# EAGLE board mf_tray_mb_v9 (EAGLE 8.0.1), part 1 of 2
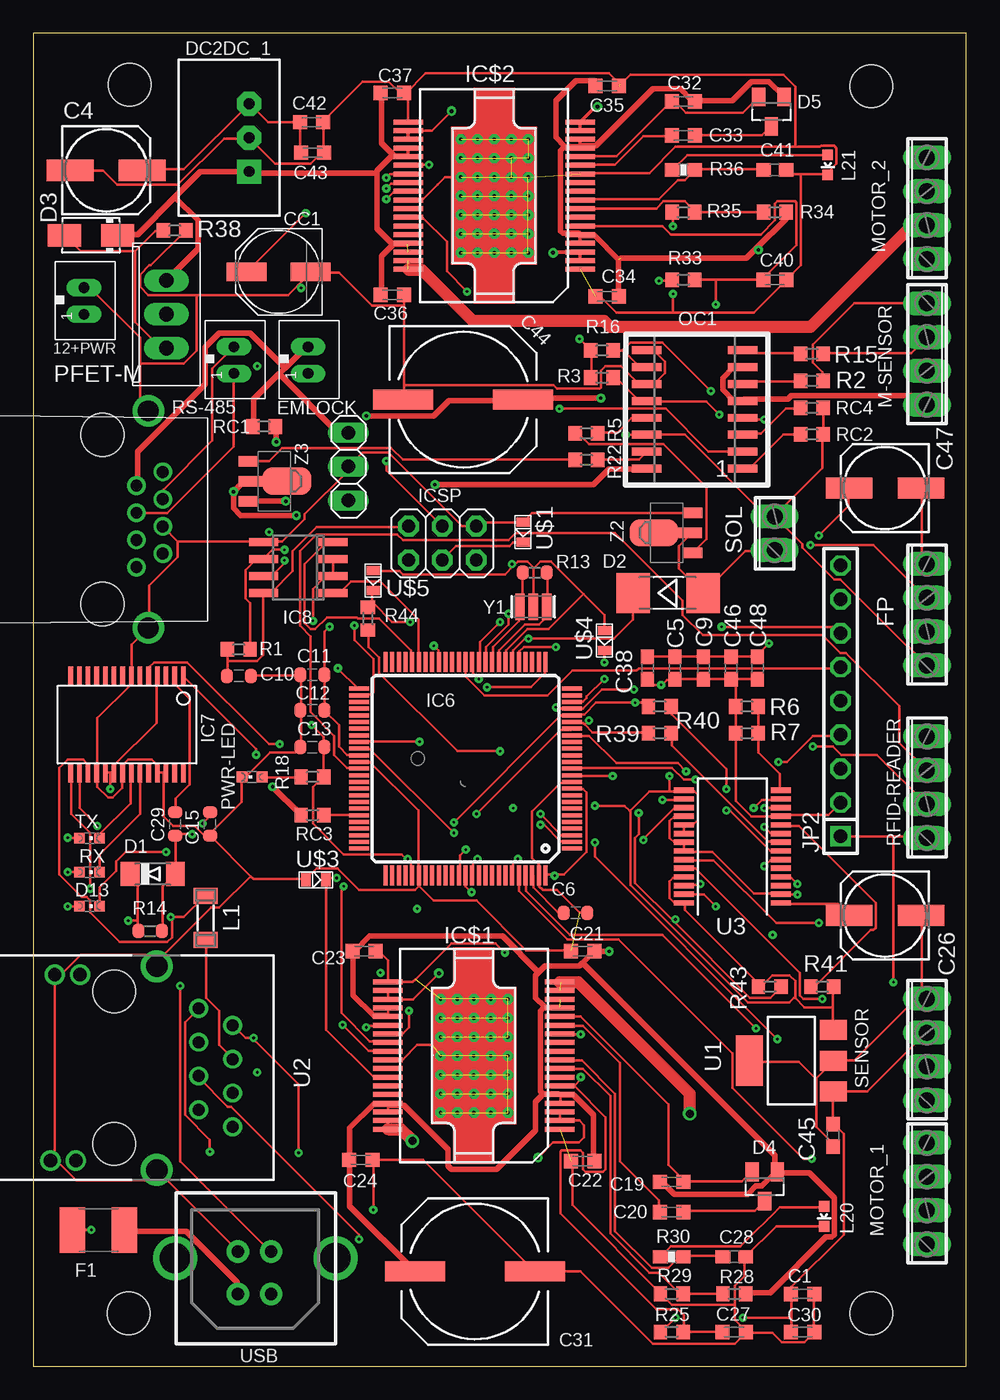
[diagram p0: board, top side]
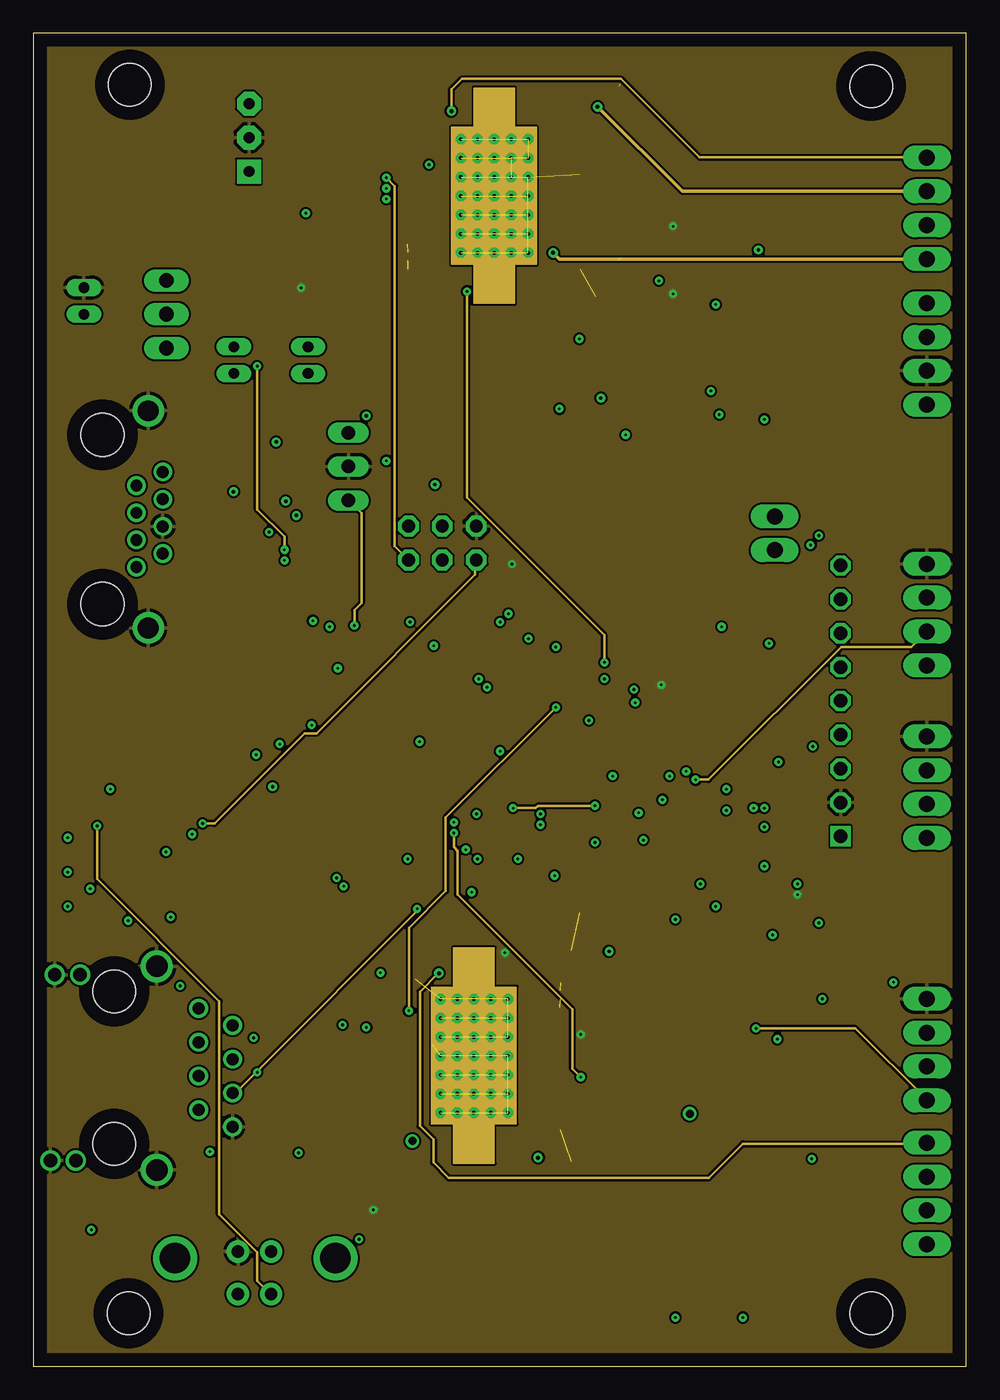
[diagram p1: board, inner layer Route2]
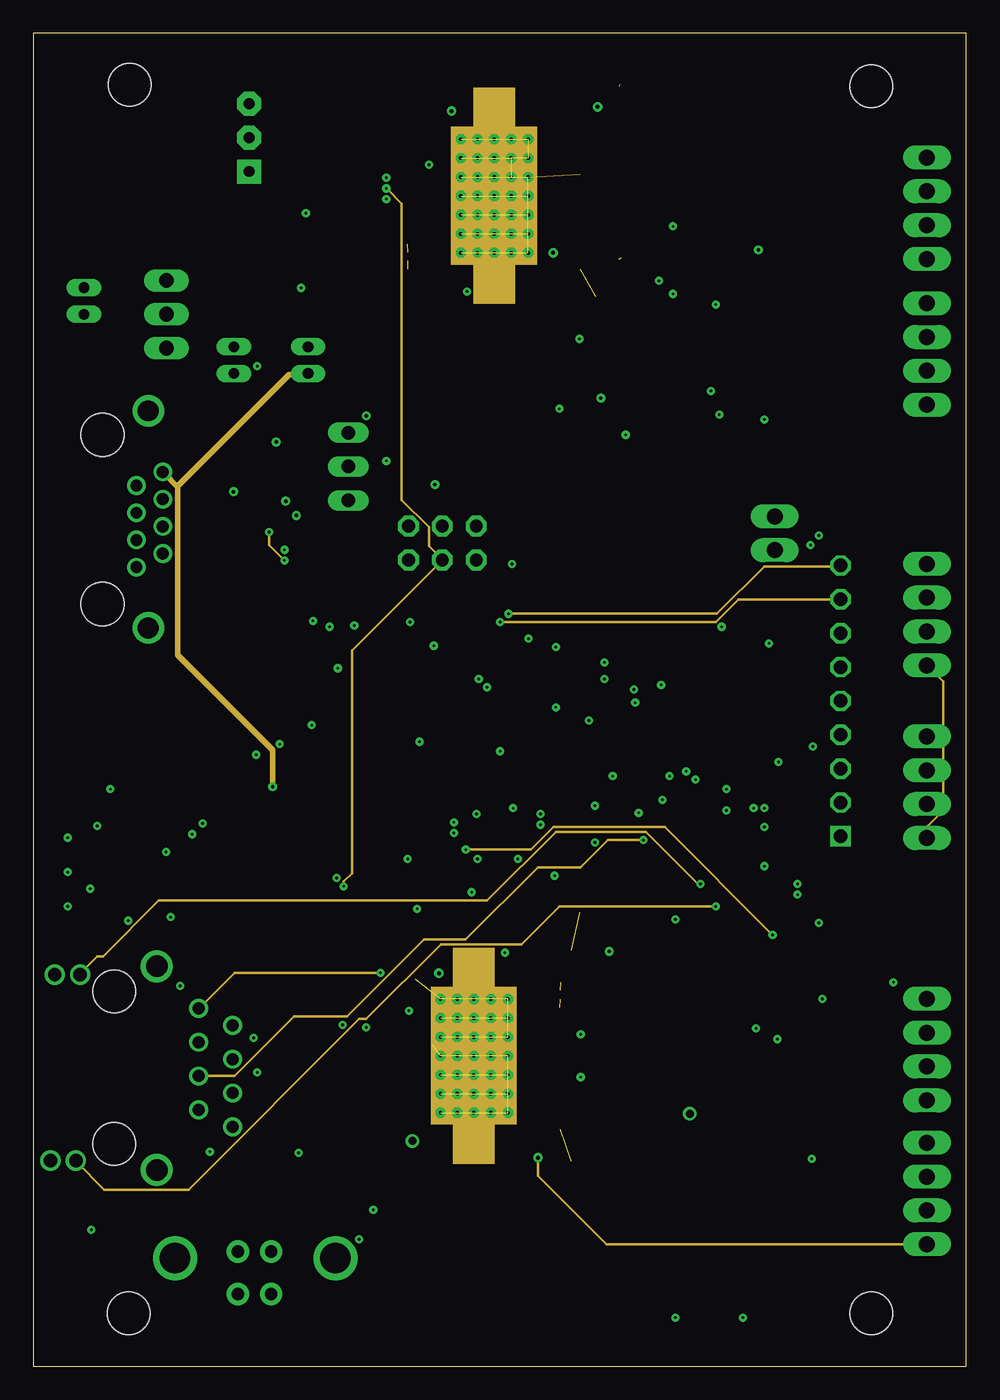
[diagram p2: board, inner layer Route15]
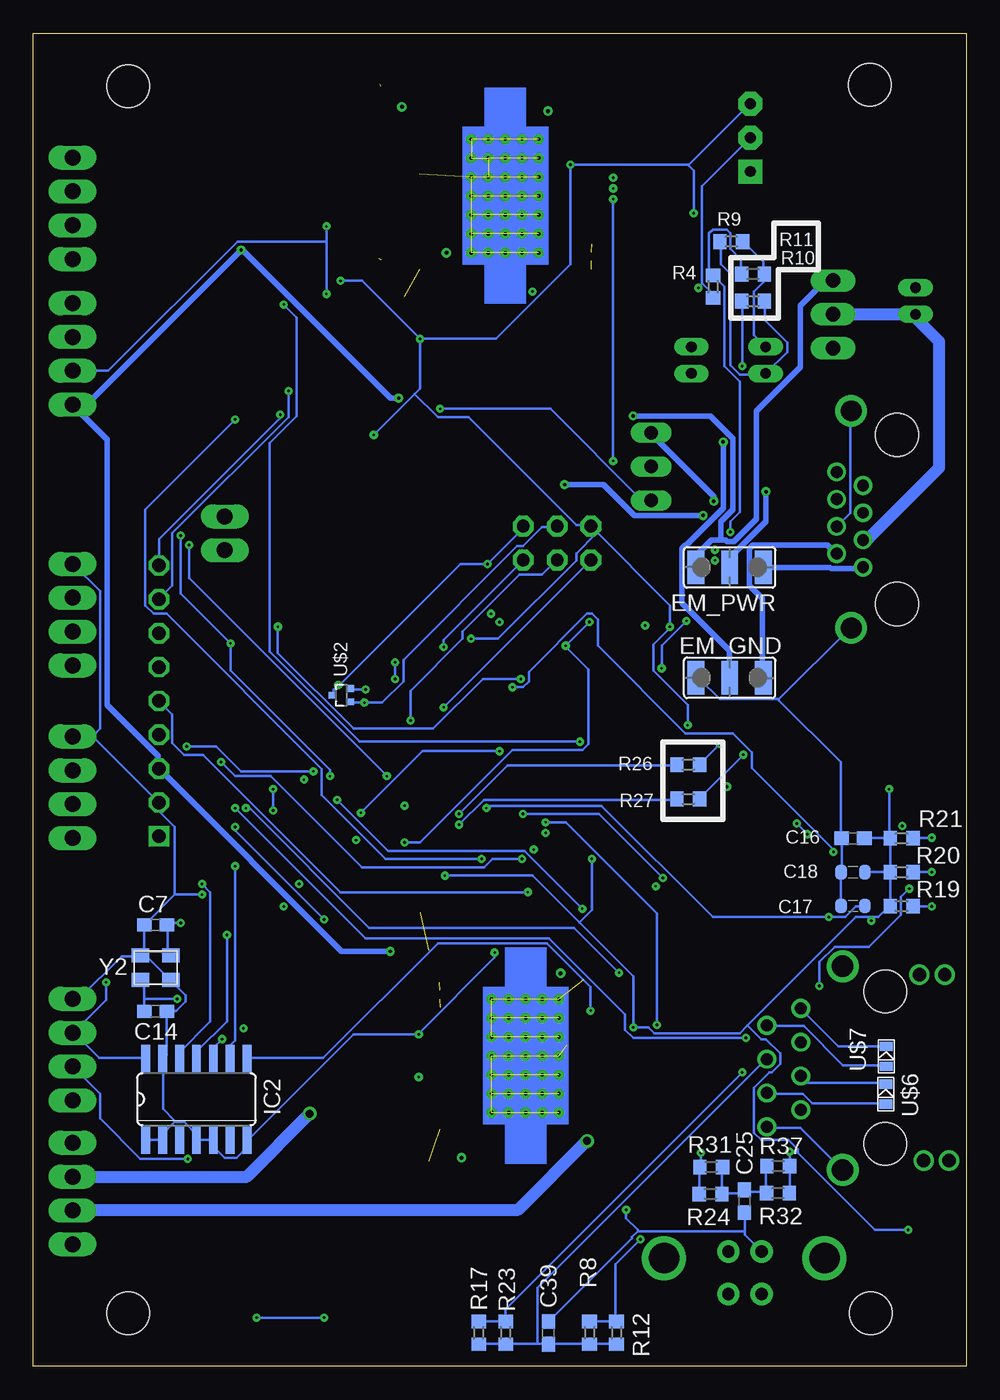
[diagram p3: board, bottom side, seen from below]

Size 70 x 100 mm. Coordinates in mm from the lower left corner, seen from the top.
Outline: 0,0 70,0 70,100 0,100 0,0
Copper layers (1+2*15+16): Top 0.035mm / dielectric 1.5mm / Route2 0.035mm / dielectric 0.15mm / Route15 0.035mm / dielectric 0.2mm / Bottom 0.035mm
Design rules "default *": minimum track width 8mil, minimum drill 8mil, track to track 6mil, track to pad 6mil, pad to pad 6mil, via to via 6mil, smd to smd 6mil, copper to edge 40mil, drill to drill 8mil, minimum pad ring 10mil, minimum via ring 8mil, stop-mask expansion 4mil, vias tented up to drill 0mil, thermal gap 10mil
Net classes: 1 power: width 0.406 mm, drill 0.254 mm, clearance 0.152 mm; 2 Massa: width 1.2 mm, drill 0.6 mm, clearance 0.2 mm; 3 Mot: width 1.2 mm, drill 0.8 mm, clearance 0.005 mm; 4 aref: width 0.305 mm, drill 0.61 mm, clearance 0.254 mm; 5 0.6096: width 0.61 mm, drill 0.406 mm, clearance 0.254 mm; 6 0.900: width 0.9 mm, drill 0.6 mm, clearance 0.5 mm
Holes 3.2 mm at 62.87,96.04 7.14,3.97 62.87,3.97 7.24,96.14

## Footprints (pad centres in the part's own frame; a part is rotated, then mirrored left to right if it is on the bottom)
JST_B2B-PH_HEADER = drill 0.8 long: P1 1.075,0.048; P2 -0.925,0.048
C0603K = smd 1.05 x 1.08: 1 -0.875,0; 2 0.875,0
153CLV-0605 = smd 3.5 x 1.6: + 2.7,0; - -2.7,0
C0603 = smd 1.1 x 1: 1 -0.85,0; 2 0.85,0
C0603-ROUND = smd 0.898 x 1.1: 1 -0.889,0; 2 0.889,0
NIC_10X10.5_CAP = smd 4.5 x 1.5: + 4.5,0; - -4.5,0
PANASONIC_D = smd 3 x 1.4: + 2.4,0; - -2.4,0
MINIMELF = smd 1.4 x 1.8: A 1.7,0; C -1.7,0
MELF-MLL41 = smd 2.5 x 3: A 2.625,0; C -2.625,0
DO214AC = smd 2.5 x 1.7: A 2,0; C -2,0
SOT23 = smd 1 x 1.4: 1 -0.95,-1.1; 2 0.95,-1.1; 3 0,1.1
CHIPLED_0603 = smd 0.8 x 0.8: A 0,-0.75; C 0,0.75
TSR-1 = drill 0.8 pad 1.8 square: 1 -2.54,-1.5 | drill 0.8 pad 1.8 octagon: 2 0,-1.5; 3 2.54,-1.5
SJ_2W = smd 1.27 x 2.54: 1 -2.54,0; 2 0,0; 3 2.54,0
L1812 = smd 1.9 x 3.4: 1 -1.95,0; 2 1.95,0
4POL254 = drill 1.2 long: 1 -3.81,0; 2 -1.27,0; 3 1.27,0; 4 3.81,0
SO14 = smd 0.66 x 2.032: 1 -3.81,-3.073; 2 -2.54,-3.073; 3 -1.27,-3.073; 4 0,-3.073; 5 1.27,-3.073; 6 2.54,-3.073; 7 3.81,-3.073; 8 3.81,3.073; 9 2.54,3.073; 10 1.27,3.073; 11 0,3.073; 12 -1.27,3.073; 13 -2.54,3.073; 14 -3.81,3.073
TQFP100 = smd 1.5 x 0.3: 1 -8,6; 2 -8,5.5; 3 -8,5; 4 -8,4.5; 5 -8,4; 6 -8,3.5; 7 -8,3; 8 -8,2.5; 9 -8,2; 10 -8,1.5; 11 -8,1; 12 -8,0.5; 13 -8,0; 14 -8,-0.5; 15 -8,-1; 16 -8,-1.5; 17 -8,-2; 18 -8,-2.5; 19 -8,-3; 20 -8,-3.5; 21 -8,-4; 22 -8,-4.5; 23 -8,-5; 24 -8,-5.5; 25 -8,-6; 51 8,-6; 52 8,-5.5; 53 8,-5; 54 8,-4.5; 55 8,-4; 56 8,-3.5; 57 8,-3; 58 8,-2.5; 59 8,-2; 60 8,-1.5; 61 8,-1; 62 8,-0.5; 63 8,0; 64 8,0.5; 65 8,1; 66 8,1.5; 67 8,2; 68 8,2.5; 69 8,3; 70 8,3.5; 71 8,4; 72 8,4.5; 73 8,5; 74 8,5.5; 75 8,6 | smd 0.3 x 1.5: 26 -6,-8; 27 -5.5,-8; 28 -5,-8; 29 -4.5,-8; 30 -4,-8; 31 -3.5,-8; 32 -3,-8; 33 -2.5,-8; 34 -2,-8; 35 -1.5,-8; 36 -1,-8; 37 -0.5,-8; 38 0,-8; 39 0.5,-8; 40 1,-8; 41 1.5,-8; 42 2,-8; 43 2.5,-8; 44 3,-8; 45 3.5,-8; 46 4,-8; 47 4.5,-8; 48 5,-8; 49 5.5,-8; 50 6,-8; 76 6,8; 77 5.5,8; 78 5,8; 79 4.5,8; 80 4,8; 81 3.5,8; 82 3,8; 83 2.5,8; 84 2,8; 85 1.5,8; 86 1,8; 87 0.5,8; 88 0,8; 89 -0.5,8; 90 -1,8; 91 -1.5,8; 92 -2,8; 93 -2.5,8; 94 -3,8; 95 -3.5,8; 96 -4,8; 97 -4.5,8; 98 -5,8; 99 -5.5,8; 100 -6,8
SSOP28DB = smd 0.348 x 1.397: 1 -4.225,-3.656; 2 -3.575,-3.656; 3 -2.925,-3.656; 4 -2.275,-3.656; 5 -1.625,-3.656; 6 -0.975,-3.656; 7 -0.325,-3.656; 8 0.325,-3.656; 9 0.975,-3.656; 10 1.625,-3.656; 11 2.275,-3.656; 12 2.925,-3.656; 13 3.575,-3.656; 14 4.225,-3.656; 15 4.225,3.656; 16 3.575,3.656; 17 2.925,3.656; 18 2.275,3.656; 19 1.625,3.656; 20 0.975,3.656; 21 0.325,3.656; 22 -0.325,3.656; 23 -0.975,3.656; 24 -1.625,3.656; 25 -2.275,3.656; 26 -2.925,3.656; 27 -3.575,3.656; 28 -4.225,3.656
SO-08 = smd 0.6 x 2.2: 1 -1.905,-2.6; 2 -0.635,-2.6; 3 0.635,-2.6; 4 1.905,-2.6; 5 1.905,2.6; 6 0.635,2.6; 7 -0.635,2.6; 8 -1.905,2.6
L6470_4L_2_15-POWERSO36 = smd 0.38 x 2.2: ADCIN 7.09,0.37; AGND 9.69,0.37; BUSY\SYNC 7.09,13.27; CK 9.04,13.27; CP 10.34,0.37; CS 6.44,13.27; DGND 7.74,13.27; FLAG 5.79,13.27; OSCIN 8.39,0.37; OSCOUT 9.04,0.37; OUT1A_1 3.19,0.37; OUT1A_2 3.84,0.37; OUT1B_1 12.94,0.37; OUT1B_2 13.59,0.37; OUT2A_1 3.19,13.27; OUT2A_2 2.54,13.27; OUT2B_1 12.94,13.27; OUT2B_2 12.29,13.27; PGND_1 2.54,0.37; PGND_2 13.59,13.27; SDI 8.39,13.27; SDO 9.69,13.27; STBY/RST 5.79,0.37; STCK 5.14,13.27; SW 6.44,0.37; VBOOT 10.99,0.37; VDD 10.34,13.27; VREG 7.74,0.37; VSA_1 4.49,0.37; VSA_2 5.14,0.37; VSA_3 4.49,13.27; VSA_4 3.84,13.27; VSB_1 11.64,0.37; VSB_2 12.29,0.37; VSB_3 11.64,13.27; VSB_4 10.99,13.27 | drill 0.254 octagon: GND_1 3.78,4.27; GND_2 5.2,4.27; GND_3 6.62,4.27; GND_4 8.04,4.27; GND_5 9.46,4.27; GND_6 10.88,4.27; GND_7 12.3,4.27; GND_8 12.3,5.545; GND_9 10.88,5.545; GND_10 9.46,5.545; GND_11 8.04,5.545; GND_12 6.62,5.545; GND_13 5.2,5.545; GND_14 3.78,5.545; GND_15 12.3,6.82; GND_16 10.88,6.82; GND_17 9.46,6.82; GND_18 8.04,6.82; GND_19 6.62,6.82; GND_20 5.2,6.82; GND_21 3.78,6.82; GND_22 3.78,8.07; GND_23 5.2,8.07; GND_24 6.62,8.07; GND_25 8.04,8.07; GND_26 9.46,8.07; GND_27 10.88,8.07; GND_28 12.3,8.07; GND_29 12.3,9.32; GND_30 10.88,9.32; GND_31 9.46,9.32; GND_32 8.04,9.32; GND_33 6.62,9.32; GND_34 5.2,9.32; GND_35 3.78,9.32
2X03 = drill 0.95 pad 1.55 octagon: 1 -2.54,-1.27; 2 -2.54,1.27; 3 0,-1.27; 4 0,1.27; 5 2.54,-1.27; 6 2.54,1.27
1X09 = drill 1.016 square: 1 -10.16,0 | drill 1.016 octagon: 2 -7.62,0; 3 -5.08,0; 4 -2.54,0; 5 0,0; 6 2.54,0; 7 5.08,0; 8 7.62,0; 9 10.16,0
SM-1206 = smd 1.2 x 1.8: 1 -1.65,0; 2 1.65,0
LED-0603 = smd 0.8 x 0.8: A 0,-0.75; C 0,0.75
SOP16 = smd 0.6 x 2.2: 1 -4.455,-3.6; 2 -3.185,-3.6; 3 -1.915,-3.6; 4 -0.645,-3.6; 5 0.625,-3.6; 6 1.895,-3.6; 7 3.165,-3.6; 8 4.435,-3.6; 9 4.435,3.6; 10 3.165,3.6; 11 1.895,3.6; 12 0.625,3.6; 13 -0.645,3.6; 14 -1.915,3.6; 15 -3.185,3.6; 16 -4.455,3.6
FQP47P06-NORMAL = drill 1.118 long: 1 2.54,-2.54; 2 5.08,-2.54; 3 7.62,-2.54
R0603@1 = smd 1 x 1.1: 1 -0.85,0; 2 0.85,0
R0603 = smd 1 x 1.1: 1 -0.85,0; 2 0.85,0
R0603-ROUND = smd 0.898 x 1.1: 1 -0.889,0; 2 0.889,0
0603-RES = smd 1.1 x 1: 1 -0.85,0; 2 0.85,0
2POL254 = drill 1.2 long: 1 -1.27,0; 2 1.27,0
SOT223 = smd 1.5 x 2: 1 -3.57,-3.15; 2 -1.27,-3.15; 3 1.03,-3.15 | smd 3.8 x 2: 4 -1.27,3.15
5-6605758-1 = drill 0.9 pad 1.3: 1 -4.445,0; 2 -3.175,2.54; 3 -1.905,0; 4 -0.635,2.54; 5 0.635,0; 6 1.905,2.54; 7 3.175,0; 8 4.445,2.54 | drill 1 pad 1.422: D1 -6.973,-8.902; D2 -6.973,-10.807; D3 6.973,-9.219; D4 6.973,-11.124 | drill 1.6 pad 2.184: M1 7.683,-3.141; M2 -7.603,-3.141 | hole 3.2: 5.715,-6.35; -5.715,-6.35
SSOP28 = smd 0.4 x 1.5: 1 -4.225,-3.625; 2 -3.575,-3.625; 3 -2.925,-3.625; 4 -2.275,-3.625; 5 -1.625,-3.625; 6 -0.975,-3.625; 7 -0.325,-3.625; 8 0.325,-3.625; 9 0.975,-3.625; 10 1.625,-3.625; 11 2.275,-3.625; 12 2.925,-3.625; 13 3.575,-3.625; 14 4.225,-3.625; 15 4.225,3.625; 16 3.575,3.625; 17 2.925,3.625; 18 2.275,3.625; 19 1.625,3.625; 20 0.975,3.625; 21 0.325,3.625; 22 -0.325,3.625; 23 -0.975,3.625; 24 -1.625,3.625; 25 -2.275,3.625; 26 -2.925,3.625; 27 -3.575,3.625; 28 -4.225,3.625
1X03 = drill 1.016 long: 1 -2.54,0; 2 0,0; 3 2.54,0
0402 = smd 0.7 x 1: A -0.5,0; C 1,0
SOT416 = smd 0.5 x 0.6: 1 -0.5,-0.65; 2 0.5,-0.65; 3 0,0.65
RJ45-TOP = drill 0.89: 1 3.58,2.54; 2 2.56,4.52; 3 1.54,2.54; 4 0.52,4.52; 5 -0.5,2.54; 6 -1.52,4.52; 7 -2.54,2.54; 8 -3.56,4.52 | drill 1.57: GND1 -8.15,3.43; GND2 8.13,3.43 | hole 3.25: -6.35,0; 6.35,0
USB-B-PTH-VERTICAL = drill 0.914 pad 1.676: D+ 4.826,4.394; D- 4.826,7.595; GND 7.315,4.394; VBUS 7.315,7.595 | drill 2.286: P$1 0,4.902; P$2 12.04,4.902
RESONATOR = smd 0.7 x 2: 1 -1,0; 2 0,0; 3 1,0
CRYSTAL-3.2-2.5 = smd 1.3 x 1.05: 1 -1.15,-0.925; 2 1.15,-0.925; 3 1.15,0.925; 4 -1.15,0.925
SOT89 = smd 0.8 x 1.4: 1 -1.499,-1.981; 3 1.499,-1.981 | smd 0.8 x 1.9: 2 0,-1.727 | smd 2.032 x 3.65: 2@1 0,0.94

## Placement (x,y rotation side)
12+PWR  [JST_B2B-PH_HEADER]  3.75,80 270 top
C1  100n  [C0603K]  57.72,5.43 180 top
C4  10u  [153CLV-0605]  5.47,89.72 0 top
C5  100n  [C0603]  48.14,52.38 270 top
C6  100n  [C0603-ROUND]  40.69,34.01 0 top
C7  22p  [C0603]  60.82,33.11 180 bottom
C9  100n  [C0603]  50.28,52.38 270 top
C10  100n  [C0603-ROUND]  15.42,51.79 0 top
C11  100n  [C0603-ROUND]  20.94,51.87 180 top
C12  100n  [C0603-ROUND]  20.94,49.21 180 top
C13  100n  [C0603-ROUND]  20.94,46.45 180 top
C14  22p  [C0603]  60.82,26.62 0 bottom
C15  22p  [C0603-ROUND]  13.25,40.67 270 top
C16  100n  [C0603]  8.49,39.6 180 bottom
C17  100n  [C0603-ROUND]  8.49,34.52 0 bottom
C18  100n  [C0603-ROUND]  8.49,37.06 180 bottom
C19  220n  [C0603K]  47.9,13.83 180 top
C20  10n  [C0603K]  47.9,11.57 0 top
C21  100n  [C0603K]  41.24,31.13 0 top
C22  100n  [C0603K]  41.24,15.38 0 top
C23  100n  [C0603K]  24.82,31.13 180 top
C24  100n  [C0603K]  24.59,15.48 180 top
C25  10n  [C0603]  16.65,12.38 270 bottom
C26  10u  [153CLV-0605]  63.9,33.82 180 top
C27  1n  [C0603K]  52.59,2.57 180 top
C28  10uF  [C0603]  52.59,8.21 0 top
C29  100n  [C0603-ROUND]  10.63,40.67 270 top
C30  1u  [C0603K]  57.71,2.57 180 top
C31  100uF  [NIC_10X10.5_CAP]  33.14,7.11 180 top
C32  220n  [C0603K]  48.78,94.88 0 top
C33  10n  [C0603K]  48.78,92.34 0 top
C34  100n  [C0603K]  43.07,80.25 0 top
C35  100n  [C0603K]  43.06,96.04 180 top
C36  100n  [C0603K]  26.94,80.38 180 top
C37  100n  [C0603K]  26.94,95.52 180 top
C38  100n  [C0603]  46.08,52.38 270 top
C39  100n  [C0603]  31.34,2.49 90 bottom
C40  1n  [C0603K]  55.64,81.5 180 top
C41  10uF  [C0603]  55.64,89.75 0 top
C42  100n  [C0603K]  20.88,93.33 180 top
C43  1u  [C0603K]  20.95,91.05 180 top
C44  100uF  [NIC_10X10.5_CAP]  32.25,72.52 0 top
C45  100n  [C0603]  60.01,17.32 270 top
C46  100n  [C0603]  52.35,52.38 270 top
C47  10u  [153CLV-0605]  63.9,65.88 180 top
C48  100n  [C0603]  54.33,52.38 270 top
CC1  47u  [PANASONIC_D]  18.42,82.1 180 top
D1  CD1206  [MINIMELF]  8.96,36.93 0 top
D2  SM4007  [MELF-MLL41]  47.63,58.01 0 top
D3  [DO214AC]  4.33,84.84 180 top
D4  BAV99  [SOT23]  54.88,13.48 180 top
D5  BAV99  [SOT23]  55.38,94.12 180 top
D13  [CHIPLED_0603]  4.21,34.52 270 top
DC2DC_1  TSR1-2450  [TSR-1]  14.69,92.17 90 top
EM_GND  [SJ_2W]  17.75,51.65 0 bottom
EM_PWR  [SJ_2W]  17.75,59.94 0 bottom
EMLOCK  [JST_B2B-PH_HEADER]  20.57,75.56 270 top
F1  500mA  [L1812]  4.89,10.22 0 top
FP  2.5mm  [4POL254]  67.06,56.39 90 top
IC2  74ACT125D  [SO14]  57.76,20.03 0 bottom
IC6  [TQFP100]  32.43,44.83 180 top
IC7  FT232RL  [SSOP28DB]  7.04,48.14 180 top
IC8  MAX485  [SO-08]  19.89,59.92 90 top
IC$1  L6470L6470_4L_2_15  [L6470_4L_2_15-POWERSO36]  39.88,15.24 90 top
IC$2  L6470L6470_4L_2_15  [L6470_4L_2_15-POWERSO36]  41.4,79.76 90 top
ICSP  [2X03]  30.7,61.76 0 top
JP2  [1X09]  60.58,49.91 90 top
L1  Ferrit Bead  [SM-1206]  12.93,33.65 90 top
L20  Amber  [LED-0603]  59.34,11.25 180 top
L21  Amber  [LED-0603]  59.61,90.11 180 top
M-SENSOR  [4POL254]  67.06,75.95 270 top
MOTOR_1  M1  [4POL254]  67.06,12.95 90 top
MOTOR_2  M2  [4POL254]  67.06,86.87 90 top
OC1  ACPL-247  [SOP16]  49.62,71.8 90 top
PFET-M  [FQP47P06-NORMAL]  7.45,73.84 90 top
PWR-LED  [CHIPLED_0603]  16.42,44.21 90 top
R1  4.7k  [R0603@1]  15.42,53.79 180 top
R2  2.2k  [R0603@1]  58.42,73.91 0 top
R3  1k  [R0603@1]  42.67,74.17 0 top
R4  4.7k  [R0603@1]  19,81 90 bottom
R5  330  [R0603@1]  41.5,70 0 top
R6  2k7  [R0603]  53.54,47.5 180 top
R7  15k  [R0603]  53.54,49.5 180 top
R8  100R  [R0603]  28.27,2.49 270 bottom
R9  120  [R0603@1]  17.64,84.37 180 bottom
R10  10  [R0603@1]  16,79.9 180 bottom
R11  10  [R0603@1]  16,81.93 180 bottom
R12  100R  [R0603]  26.24,2.49 270 bottom
R13  1M  [R0603-ROUND]  37.62,59.54 0 top
R14  10K  [R0603-ROUND]  8.77,32.66 180 top
R15  2.2k  [R0603@1]  58.42,75.95 0 top
R16  1k  [R0603@1]  42.67,76.2 0 top
R17  100R  [R0603]  36.59,2.49 270 bottom
R18  1k  [R0603@1]  20.94,44.21 0 top
R19  1k  [R0603@1]  4.85,34.52 180 bottom
R20  1k  [R0603@1]  4.85,37.06 0 bottom
R21  1k  [R0603@1]  4.85,39.6 0 bottom
R22  330  [R0603@1]  41.5,68 0 top
R23  100R  [R0603]  34.55,2.49 270 bottom
R24  100R  [R0603]  19.18,12.92 180 bottom
R25  10k  [R0603]  47.9,2.57 180 top
R26  1k  [R0603@1]  20.86,45.12 180 bottom
R27  1k  [R0603@1]  20.86,42.55 180 bottom
R28  2.7k  [R0603]  52.59,5.43 0 top
R29  51k  [R0603]  47.9,5.43 0 top
R30  1K  [0603-RES]  47.9,8.21 0 top
R31  100R  [R0603]  19.13,14.95 180 bottom
R32  100R  [R0603]  14.11,12.98 0 bottom
R33  10k  [R0603]  48.78,81.5 180 top
R34  2.7k  [R0603]  55.64,86.58 0 top
R35  51k  [R0603]  48.78,86.58 0 top
R36  1K  [0603-RES]  48.78,89.75 0 top
R37  100R  [R0603]  14.11,15.02 0 bottom
R38  1k  [R0603]  10.61,85.21 0 top
R39  100R  [R0603]  47,47.5 180 top
R40  100R  [R0603]  47,49.5 180 top
R41  10k  [R0603]  59.19,28.47 0 top
R43  10k  [R0603]  55.26,28.48 180 top
R44  100R  [R0603]  25.11,56.08 90 top
RC1  1k  [R0603@1]  17.32,70.5 180 top
RC2  470  [R0603@1]  58.42,69.9 0 top
RC3  1k  [R0603@1]  20.94,41.34 0 top
RC4  470  [R0603@1]  58.42,71.89 0 top
RFID-READER  ID-12LA  [4POL254]  67.06,43.43 90 top
RS-485  [JST_B2B-PH_HEADER]  15,75.56 270 top
RX  GREEN  [CHIPLED_0603]  4.21,37.06 270 top
SENSOR  SENSOR  [4POL254]  67.06,23.75 90 top
SOL  [2POL254]  55.63,62.48 90 top
TX  YELLOW  [CHIPLED_0603]  4.21,39.6 270 top
U1  TC1262-33VDB  [SOT223]  56.88,24.19 90 top
U2  Tyco 5-6605758-1  [5-6605758-1]  12.41,22.4 270 top
U3  ENC28J60-SSOP  [SSOP28]  52.45,38.98 90 top
U3V12F12  EM_CTRL  [1X03]  23.65,67.5 90 top
U$1  GG0402050R3C2P  [0402]  36.76,62.83 270 top
U$2  RCLAMP0582BQ  [SOT416]  46.88,50.34 90 bottom
U$3  GG0402050R3C2P  [0402]  20.94,36.5 0 top
U$4  GG0402050R3C2P  [0402]  42.87,54.69 270 top
U$5  GG0402050R3C2P  [0402]  25.5,59.19 270 top
U$6  GG0402050R3C2P  [0402]  6.03,20.16 90 bottom
U$7  GG0402050R3C2P  [0402]  6,23 90 bottom
U$10  RJ45-TOP-1-406541-1-CAN-MB  [RJ45-TOP]  5.2,63.53 270 top
USB  USB  [USB-B-PTH-VERTICAL]  22.67,13 180 top
Y1  [RESONATOR]  37.52,56.97 180 top
Y2  25MHz  [CRYSTAL-3.2-2.5]  60.82,29.9 0 bottom
Z2  ZXTN2010Z  [SOT89]  47.51,62.53 90 top
Z3  ZXTN2010Z  [SOT89]  18.1,66.4 270 top

## Library data of the parts
12+PWR EMLOCK RS-485 = SRG
C1 C42 = rcl; MANUFACTURER: Kemet; PARTNR: C0603C104K3RACTU; TYPE: X7R; VOLTAGE: 25V
C4 C26 C47 R1-R5 R9-R11 R15 R16 R18-R22 R26 R27 R38 RC1-RC4 = resistor
C5 C7 C9 C14 C16 C25 C38 C39 C45 C46 C48 CC1 F1 R6-R8 R12 R17 R23 R24 R31 R32 R37 R39-R41 R43 R44 = rcl
C6 C10-C13 C15 C17 C18 C29 IC6 ICSP R13 R14 Y1 Y2 = SmartPrj
C19 C32 = rcl; MANUFACTURER: AVX; PARTNR: 0603YC224MAT2A; TYPE: X7R; VOLTAGE: 16V
C20 C33 = rcl; MANUFACTURER: Vishay; PARTNR: VJ0603Y103KXAAC; TYPE: X7R; VOLTAGE: 50V
C21-C24 C34-C37 = rcl; MANUFACTURER: Kemet; PARTNR: C0603C104K5RACTU; TYPE: X7R; VOLTAGE: 50V
C27 C40 = rcl; MANUFACTURER: Vishay; PARTNR: VJ0603Y102MXQCW1BC; TYPE: X7R; VOLTAGE: 10V
C28 C41 = rcl; MANUFACTURER: Taiyo Yuden; PARTNR: JMK316B7226ML-T; TYPE: X7R; VOLTAGE: 6.3V
C30 C43 = rcl; MANUFACTURER: Kemet; PARTNR: C0603C105K4RACTU; TYPE: X7R; VOLTAGE: 16V
C31 C44 = SparkFun-Capacitors; MOUSER: 647-UUX1J101MNL1GS; PROD_ID: CAP-08362
D1 = diode
D2 = _mod_diode
D3 = 1sma59xx_10; MF: ON Semiconductor; MPN: 1SMA5925BT3G; OC_FARNELL: 1431147; OC_NEWARK: 71J9198
D4 D5 = diode; MANUFACTURER: NXP; PARTNR: BAV99,215
D13 PWR-LED RX TX = led
DC2DC_1 = SteelCaveRobotics-Power
EM_GND EM_PWR = jumper
FP M-SENSOR MOTOR_1 MOTOR_2 RFID-READER SENSOR SOL = con-phoenix-254; OC_FARNELL: unknown; OC_NEWARK: unknown
IC2 = 74xx-eu
IC7 L20 L21 R30 R36 = SparkFun
IC8 = texas; MF: TEXAS INSTRUMENTS; MPN: SN75ALS176AD; OC_FARNELL: 1410742; OC_NEWARK: 76C5099
IC$1 IC$2 = L6470PD
JP2 U3V12F12 = pinhead
L1 = inductor-neosid
OC1 = avago
PFET-M = FQP47P06
R25 R33 = rcl; MANUFACTURER: Vishay; PARTNR: CRCW060339K0FKEA
R28 R29 R34 R35 = rcl; MANUFACTURER: -; PARTNR: -; PLACED: NO
U1 = v-reg-misc
U2 = con-tycoelectronics-1
U3 = microchip-enc28j60
U$1 U$3-U$7 = GG0402050R3C2P
U$2 = SOT
U$10 = con-amphenol-rj45-ld
USB = SparkFun-Connectors
Z2 Z3 = semicon-smd-ipc

## Nets
12PWR+ [power]: C19.2 C21.2 C22.2 C23.2 C24.2 C31.+ C32.2 C34.2 C35.2 C36.2 C37.2 C44.+ D3.C D4.1 D5.1 DC2DC_1.1 EM_PWR.1 IC$1.VSA_1 IC$1.VSA_2 IC$1.VSA_3 IC$1.VSA_4 IC$1.VSB_1 IC$1.VSB_2 IC$1.VSB_3 IC$1.VSB_4 IC$2.VSA_1 IC$2.VSA_2 IC$2.VSA_3 IC$2.VSA_4 IC$2.VSB_1 IC$2.VSB_2 IC$2.VSB_3 IC$2.VSB_4 JP2.3 M-SENSOR.4 OC1.5 OC1.7 PFET-M.3 R28.2 R34.2
12PWR+DIODE [0.900]: 12+PWR.P1 PFET-M.2 U$10.3
+3V3: C5.1 C9.1 C17.2 C38.1 C46.1 C47.+ C48.1 IC7.17 L1.2 R41.2 R43.2 U1.3 U3.15 U3.19 U3.20 U3.25 U3.28
+5V: C1.2 C4.+ C10.1 C11.1 C12.1 C13.1 C16.1 C18.1 C30.2 C42.2 C43.2 C45.1 CC1.+ D1.C D2.C DC2DC_1.3 F1.1 FP.1 IC2.14 IC6.10 IC6.31 IC6.61 IC6.80 IC6.100 IC7.4 IC7.19 IC7.20 IC8.8 IC$1.VDD IC$2.VDD ICSP.2 JP2.1 OC1.14 R1.2 R3.1 R14.2 R16.1 R18.2 R19.2 R20.1 R21.1 R25.2 R33.2 RC2.2 RC4.2 RFID-READER.1 SENSOR.3 SOL.2 U1.1
A8: IC6.89 JP2.4
A9: IC6.88 JP2.5
ADCIN_1: IC$1.ADCIN R28.1 R29.2
ADCIN_2: IC$2.ADCIN R34.1 R35.2
AREF: C6.1 IC6.98
CCW-0_NC: IC$1.SW
CCW-1_NC: IC$2.SW
CS: IC2.10 IC6.42 R44.2 U$5.C
CS_1: IC6.19 IC$1.CS U$3.C
CS_2: IC6.23 IC$2.CS U$4.C
CW-0_NC: IC6.78
CW-1_NC: IC6.77
D11_NC: IC6.24
D37_NC: IC6.53
D46: IC6.38 JP2.6
D47: IC6.37 JP2.7
D48: IC6.36 JP2.8 OC1.10 R16.2
D49: IC6.35 JP2.9 OC1.12 R3.2
D+: IC7.15 USB.D+
D-: IC7.16 USB.D-
DTR: C29.1 IC7.2
ERR_NC: IC6.6
GND: 12+PWR.P2 C1.1 C4.- C5.2 C6.2 C7.2 C9.2 C10.2 C11.2 C12.2 C13.2 C14.2 C15.2 C16.2 C17.1 C18.2 C21.1 C22.1 C23.1 C24.1 C25.2 C26.- C27.1 C28.2 C30.1 C31.- C34.1 C35.1 C36.1 C37.1 C38.2 C39.2 C40.1 C41.2 C42.1 C43.1 C44.- C45.2 C46.2 C47.- C48.2 CC1.- DC2DC_1.2 EM_GND.1 FP.4 IC2.1 IC2.2 IC2.4 IC2.5 IC2.7 IC2.13 IC6.11 IC6.32 IC6.62 IC6.81 IC6.99 IC7.7 IC7.18 IC7.21 IC7.25 IC7.26 IC8.5 IC$1.AGND IC$1.DGND IC$1.GND_1 IC$1.GND_2 IC$1.GND_3 IC$1.GND_4 IC$1.GND_5 IC$1.GND_6 IC$1.GND_7 IC$1.GND_8 IC$1.GND_9 IC$1.GND_10 IC$1.GND_11 IC$1.GND_12 IC$1.GND_13 IC$1.GND_14 IC$1.GND_15 IC$1.GND_16 IC$1.GND_17 IC$1.GND_18 IC$1.GND_19 IC$1.GND_20 IC$1.GND_21 IC$1.GND_22 IC$1.GND_23 IC$1.GND_24 IC$1.GND_25 IC$1.GND_26 IC$1.GND_27 IC$1.GND_28 IC$1.GND_29 IC$1.GND_30 IC$1.GND_31 IC$1.GND_32 IC$1.GND_33 IC$1.GND_34 IC$1.GND_35 IC$1.PGND_1 IC$1.PGND_2 IC$2.AGND IC$2.DGND IC$2.GND_1 IC$2.GND_2 IC$2.GND_3 IC$2.GND_4 IC$2.GND_5 IC$2.GND_6 IC$2.GND_7 IC$2.GND_8 IC$2.GND_9 IC$2.GND_10 IC$2.GND_11 IC$2.GND_12 IC$2.GND_13 IC$2.GND_14 IC$2.GND_15 IC$2.GND_16 IC$2.GND_17 IC$2.GND_18 IC$2.GND_19 IC$2.GND_20 IC$2.GND_21 IC$2.GND_22 IC$2.GND_23 IC$2.GND_24 IC$2.GND_25 IC$2.GND_26 IC$2.GND_27 IC$2.GND_28 IC$2.GND_29 IC$2.GND_30 IC$2.GND_31 IC$2.GND_32 IC$2.GND_33 IC$2.GND_34 IC$2.GND_35 IC$2.PGND_1 IC$2.PGND_2 ICSP.6 JP2.2 L20.C L21.C M-SENSOR.3 OC1.9 OC1.11 PWR-LED.C R4.1 R6.2 R7.2 R29.1 R35.1 R38.2 RFID-READER.4 SENSOR.4 U1.2 U1.4 U2.8 U2.D2 U2.D4 U2.M1 U2.M2 U3.2 U3.11 U3.18 U3.21 U3.22 U3V12F12.2 U$1.A U$2.3 U$3.A U$4.A U$5.A U$10.4 U$10.GND1 U$10.GND2 USB.GND Y1.2 Y2.2 Y2.4 Z2.3
GNDMOT_NC [power]: EM_GND.3 U$10.2
IN72#_NC: IC6.41
IN81#_NC: IC6.40
IN82#_NC: IC6.39
INT: IC2.11 IC6.87
INT_3V3: IC2.12 U3.4
L-HF_NC: IC6.93
L-SENSOR: IC6.97 SENSOR.1
LC2#_NC: IC6.55
LC3#_NC: IC6.57
LC5#_NC: IC6.71
LC6#_NC: IC6.73
LC7#_NC: IC6.75
LEDA: U2.D3 U3.27
LEDB: U2.D1 U3.26
M1-SENSOR: M-SENSOR.2 R15.2
M1_1A [0.900]: IC$1.OUT1A_1 IC$1.OUT1A_2 MOTOR_1.1
M1_1B [0.900]: IC$1.OUT1B_1 IC$1.OUT1B_2 MOTOR_1.3
M1_2A [0.900]: IC$1.OUT2A_1 IC$1.OUT2A_2 MOTOR_1.2
M1_2B [0.900]: IC$1.OUT2B_1 IC$1.OUT2B_2 MOTOR_1.4
M2-SENSOR: M-SENSOR.1 R2.2
M2_1A [0.900]: IC$2.OUT1A_1 IC$2.OUT1A_2 MOTOR_2.1
M2_1B [0.900]: IC$2.OUT1B_1 IC$2.OUT1B_2 MOTOR_2.3
M2_2A [0.900]: IC$2.OUT2A_1 IC$2.OUT2A_2 MOTOR_2.2
M2_2B [0.900]: IC$2.OUT2B_1 IC$2.OUT2B_2 MOTOR_2.4
M8RXD: IC7.1 R27.1
M8TXD: IC7.5 R26.1
MISO_1: IC2.8 IC6.22 IC$1.SDO IC$2.SDO ICSP.1 U$2.2
MOSI_1: IC6.21 IC$1.SDI IC$2.SDI ICSP.4 R40.2 U$2.1
N$1: PWR-LED.A R18.1
N$2: OC1.1 RC2.1
N$3: OC1.15 R22.2
N$4: D13.A R19.1
N$5: OC1.3 RC4.1
N$6: R21.2 TX.A
N$7: OC1.13 R5.2
N$8: R5.1 Z2.1
N$9: OC1.8 R15.1
N$10: OC1.6 R2.1
N$11 [power]: EM_PWR.2 OC1.16 Z3.2
N$12: R22.1 Z3.1
N$13 [power]: EM_GND.2 RC1.1
N$14: D3.A PFET-M.1 R38.1
N$15: R6.1 R7.1 U3.14
N$16: C19.1 D4.2 IC$1.VBOOT
N$17: C20.1 IC$1.CP
N$18: C20.2 D4.3
N$19: L20.A R30.1
N$20: C28.1 IC$1.VREG R30.2
N$21: C7.1 U3.23 Y2.3
N$22: C25.1 R24.1 R31.1 R32.1 R37.1
N$23: C39.1 L1.1 R8.2 R12.2 R17.2 R23.2 U2.4
N$24: L21.A R36.1
N$25: C14.1 U3.24 Y2.1
N$26: IC8.6 R1.1 R10.2
N$27: IC8.7 R4.2 R11.2
N$28: R20.2 RX.A
N$29: R43.1 R44.1 U3.9
N$32: U3.5
N$34: R40.1 U3.7
N$36: R39.1 U3.8
N$38: U3.3
N$39: C26.+ U3.1
N$55: C32.1 D5.2 IC$2.VBOOT
N$56: C33.1 IC$2.CP
N$57: C33.2 D5.3
N$59: C41.1 IC$2.VREG R36.2
PS4_NC: IC6.86
PS5_NC: IC6.85
PS6_NC: IC6.84
PS7_NC: IC6.83
PS8_NC: IC6.82
PWM3#_NC: IC6.1
PWM4#_NC: IC6.5
PWM5#_NC: IC6.15
PWM6#_NC: IC6.16
PWM7#_NC: IC6.17
R-DIR_NC: IC6.91
R-ENABLE_NC: IC6.92
R-HF_NC: IC6.90
R-SENSOR: IC6.96 SENSOR.2
RESET: C15.1 C29.2 D1.A IC6.30 ICSP.5 R14.1
RESET_1: C27.2 IC6.60 IC$1.STBY/RST R25.1
RESET_2: C40.2 IC6.59 IC$2.STBY/RST R33.1
RFID-EN: IC6.18 RFID-READER.2
RFID-EN1_NC: IC6.54
RFID-EN2_NC: IC6.56
RFID-EN3_NC: IC6.58
RFID-EN5_NC: IC6.72
RFID-EN6_NC: IC6.74
RFID-EN7_NC: IC6.76
RFID-TX7_NC: IC6.25
RFID-TX8: D13.C IC6.26
RS485-A: R9.2 R10.1 RS-485.P1 U$10.5
RS485-B: R9.1 R11.1 RS-485.P2 U$10.6
RS485-TX/RX: IC6.51 IC8.2 IC8.3
RST: R41.1 U3.10
RX0: IC6.2 R27.2
RX1: IC6.45 IC8.1
RX2: FP.3 IC6.12
RX3: IC6.63 RFID-READER.3
RXL: IC7.23 RX.C
SCK_1: IC6.20 IC$1.CK IC$2.CK ICSP.3 R39.2 U$1.C
SCL: IC6.43
SDA: IC6.44
SIG_NC: IC6.7
SL1-ENABLE: IC6.95 OC1.4
SL2-ENABLE: IC6.94
SO_3V3: IC2.9 U3.6
SOL1-: D2.A SOL.1 Z2.2
TPIN+: R32.2 R37.2 U2.1 U3.13 U$7.C
TPIN-: R24.2 R31.2 U2.2 U3.12 U$7.A
TPOUT+: R8.1 R12.1 U2.5 U3.17 U$6.C
TPOUT-: R17.1 R23.1 U2.6 U3.16 U$6.A
TRAY_LOCK_CONTROL_EM [power]: EMLOCK.P2 RC1.2 U3V12F12.3 U$10.7 Z3.3
TRAY_LOCK_CONTROL_UC: IC6.52 OC1.2 U3V12F12.1
TRAY_LOCK_STATUS [power]: EMLOCK.P1 RC3.1 U$10.8
TRAY_LOCK_STATUS1: IC6.70 RC3.2
TRAY_LOCK_STATUS#_NC: IC6.50
TX0: IC6.3 R26.2
TX1: IC6.46 IC8.4
TX2: FP.2 IC6.13
TX3_NC: IC6.64
TXL: IC7.22 TX.C
VMOT [power]: EM_PWR.3 U$10.1
XTAL1: IC6.34 R13.1 Y1.3
XTAL2: IC6.33 R13.2 Y1.1
XVCC [power]: F1.2 USB.VBUS